# Altium PCB PCB.PcbDoc
Units mil, origin at the board's own origin, x right, y up, seen from the top; angles counter-clockwise.
Board outline 1930 x 2000 mil, 2 copper layers (Top Layer, Bottom Layer); 59 components, 49 nets, 237 pads, 14 vias.
Unrouted connection lines stored in the file: 1.
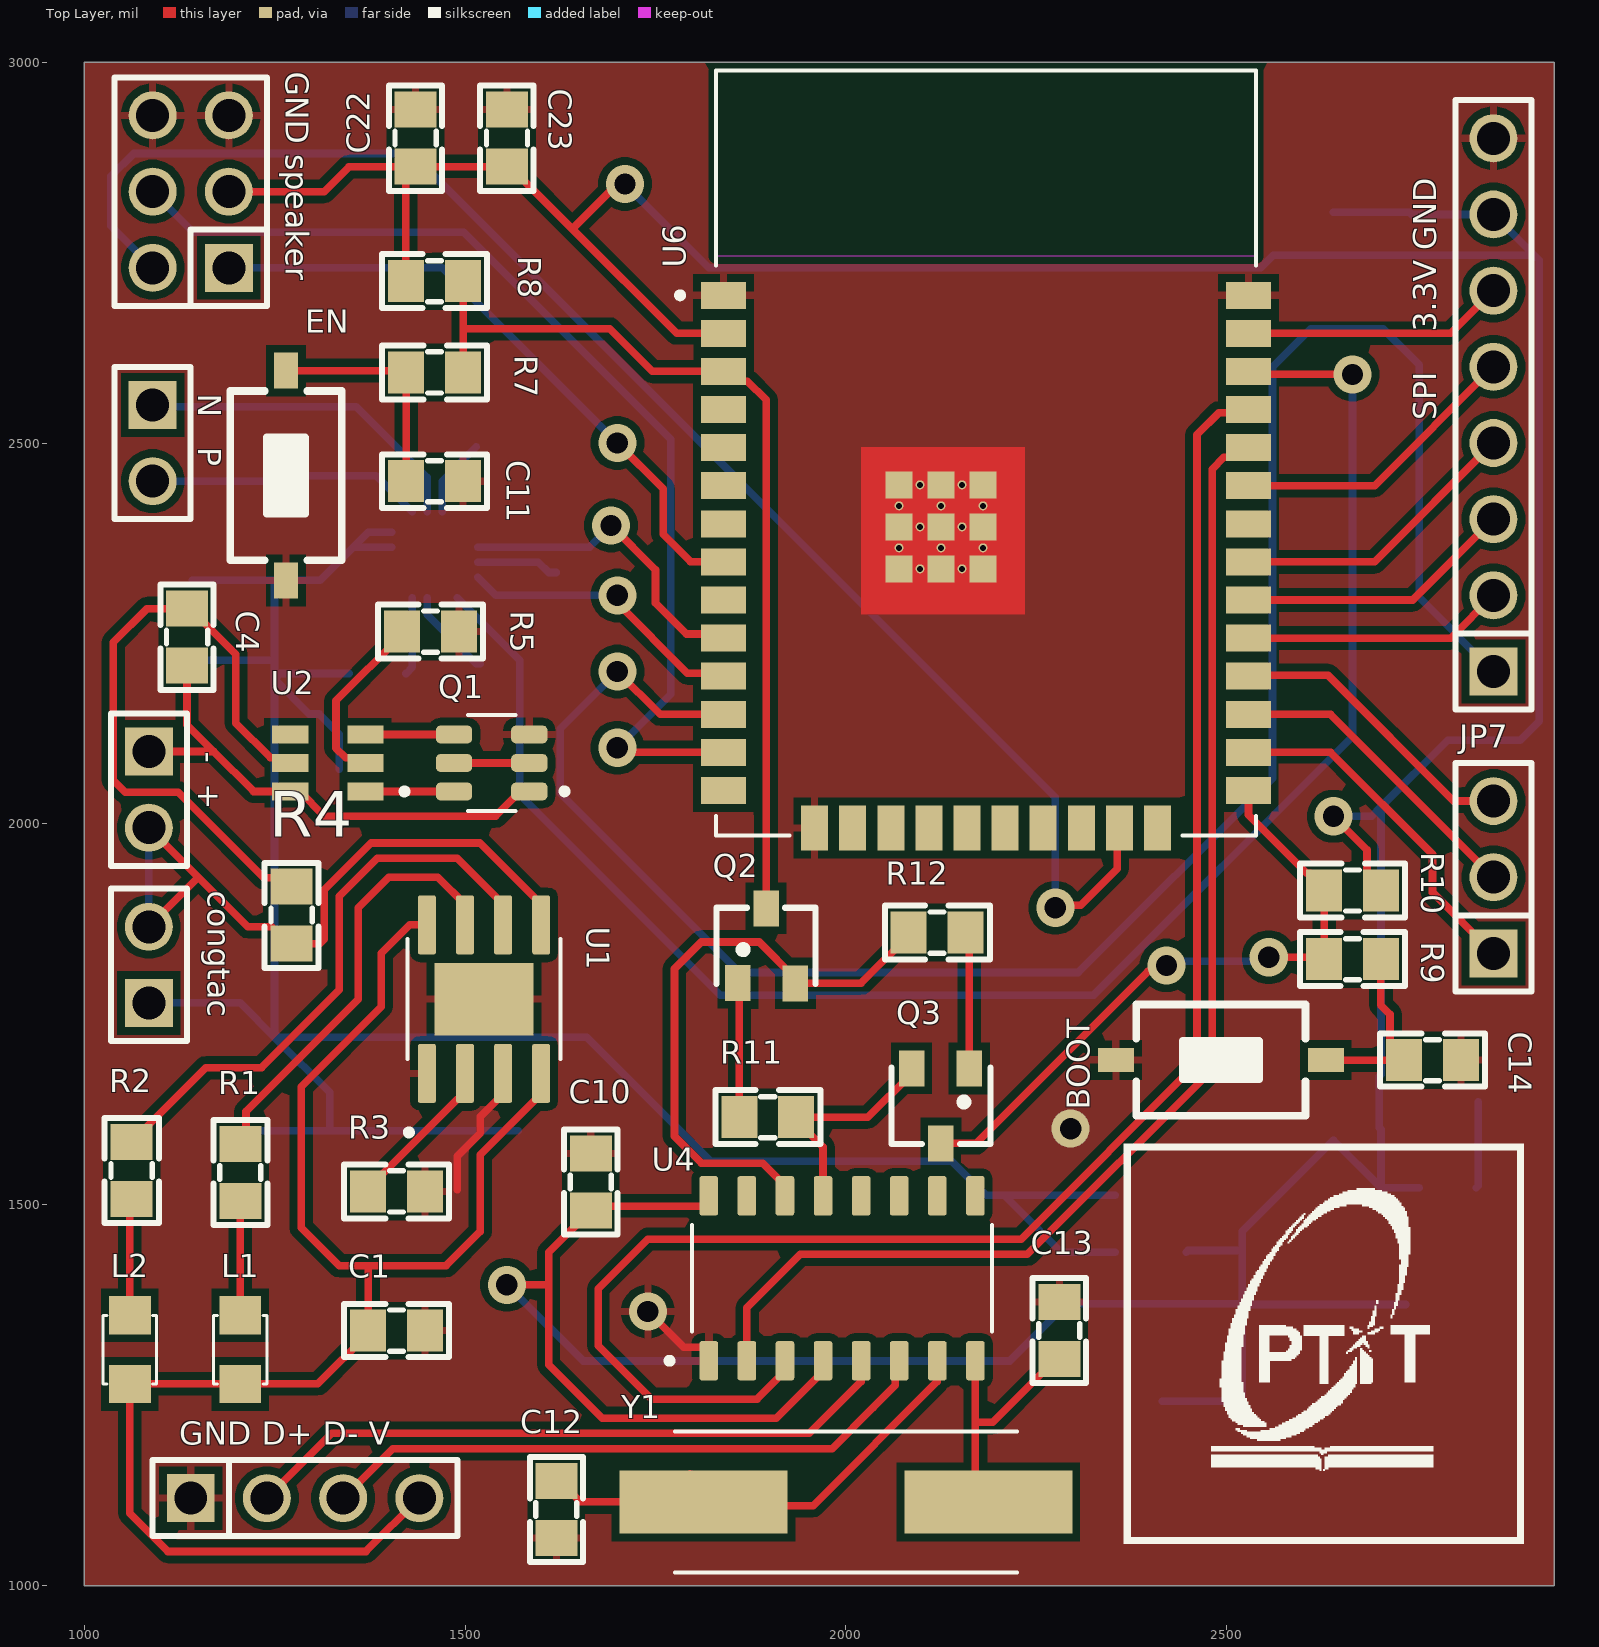
[diagram p0: Top Layer view]
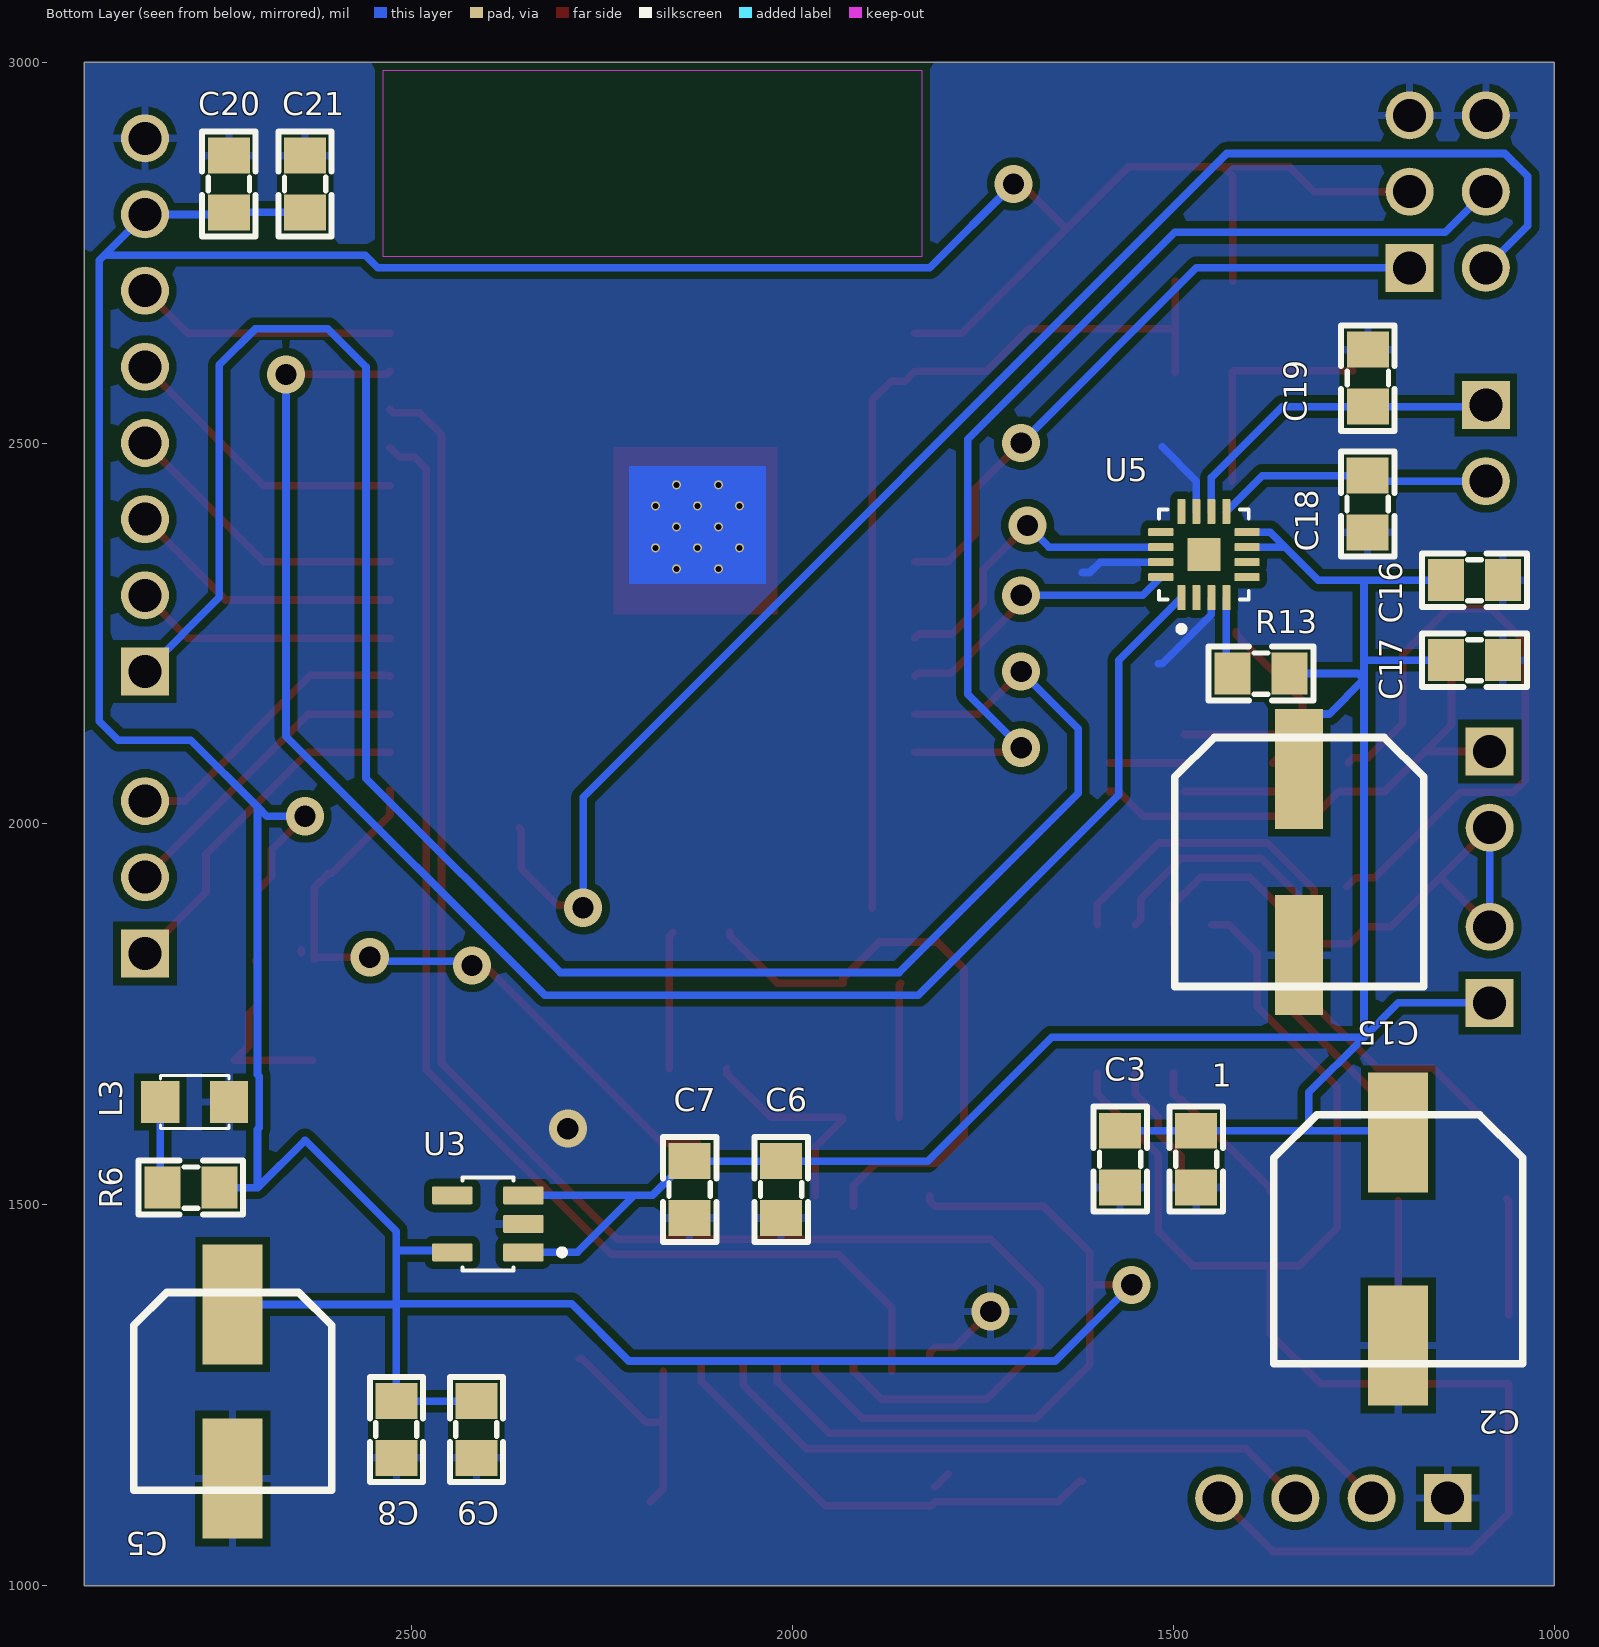
[diagram p1: Bottom Layer view, seen from below]
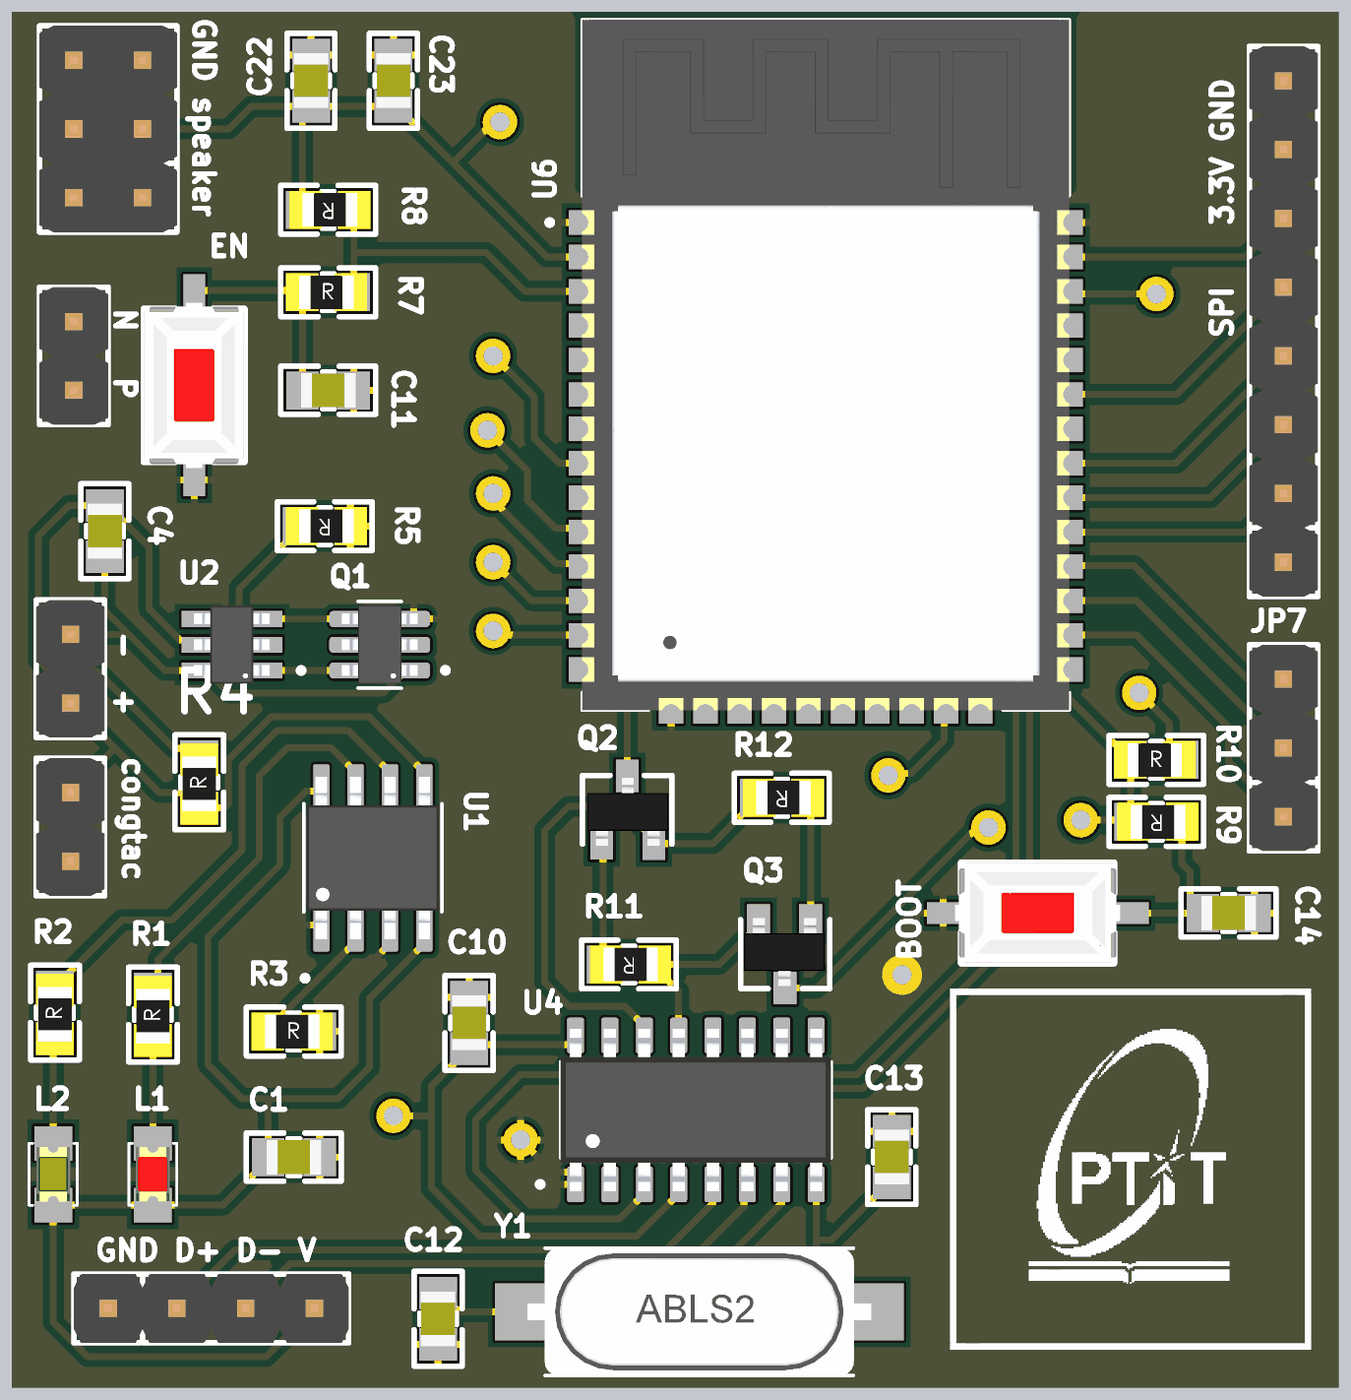
[diagram p2: 3D render of the assembled board from above, using the file's embedded part models]
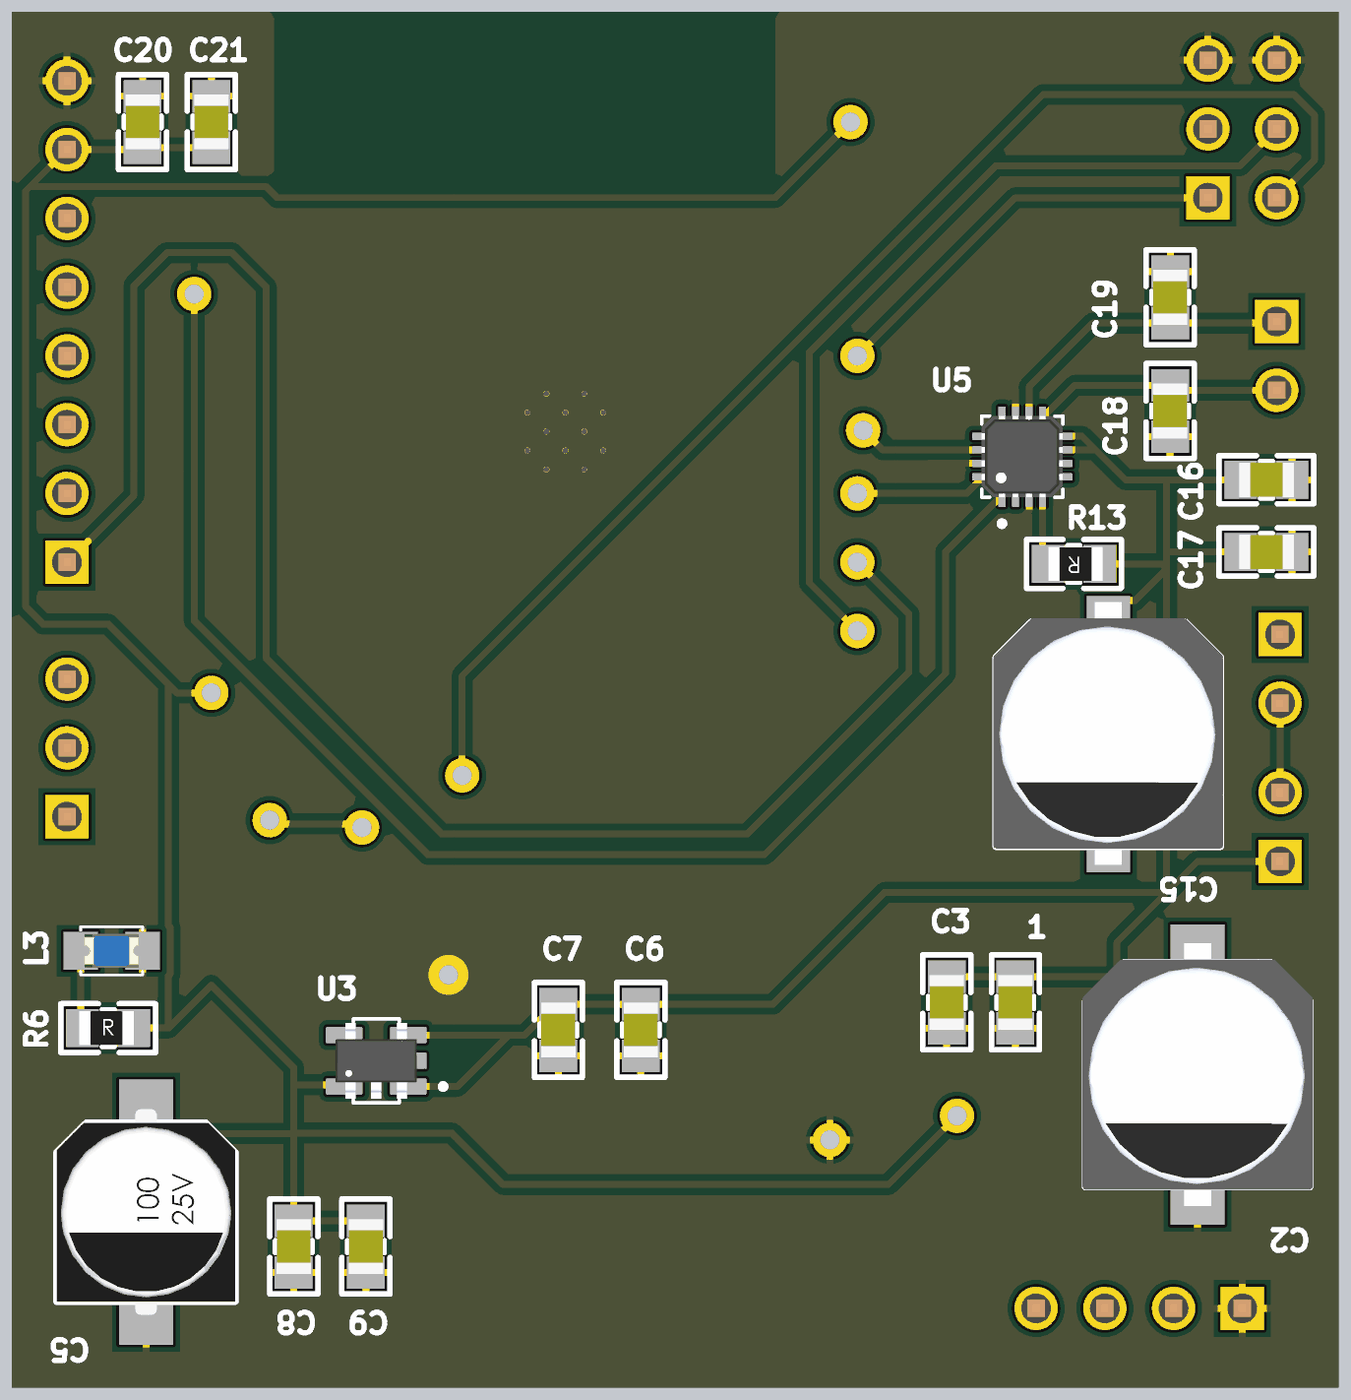
[diagram p3: 3D render of the assembled board from below, using the file's embedded part models]

## Layer stack, top to bottom
Top Solder: solder mask 0.4, Solder Resist, Dk 3.5
Top Layer: signal copper 1.4
Dielectric 1: dielectric 12.6, FR-4, Dk 4.8
Bottom Layer: signal copper 1.4
Bottom Solder: solder mask 0.4, Solder Resist, Dk 3.5

## Board outline
1000,1000 2930,1000 2930,3000 1000,3000

## Design rules (kind name [scope] priority, off if disabled: settings)
Clearance [All] p1: gap=10 ignorepadtopadclearanceinfootprint=FALSE
PolygonConnect [All] p1: connectstyle=Relief reliefconductorwidth=10 reliefentries=4 polygonreliefangle="90 Angle" airgapwidth=10
RoutingVias [All] p1: holewidth=28 width=50 viastyle="Through Hole" minholewidth=28 minwidth=50 maxholewidth=28 maxwidth=50
SolderMaskExpansion [All] p1: expansion=4 istentingtop=FALSE
SupplyNets "Schematic Supply Nets_2" [InNet('3.3V')] p1: voltage=0.000
SupplyNets "Schematic Supply Nets_1" [InNet('3.7-4.2 V')] p2: voltage=0.000
SupplyNets "Schematic Supply Nets" [InNet('GND')] p3: voltage=0.000
Width [All] p1: maxlimit=10 minlimit=10 preferedwidth=10
30 further rules are at their usual default settings.

## Classes and differential pairs
component class Source: C5 C6 C7 C8 C9 L3 R6 U3
component class Media: C15 C16 C17 C18 C19 C20 C21 "GND speaker" JP7 "N   P" R13 "SPI    3.3V GND" U5
component class Esp32: C22 C23 U6
component class Downloader: BOOT C10 C11 C12 C13 C14 EN Q2 Q3 R7 R8 R9 R10 R11 R12 U4 Y1
component class Battery: 1 "-  +" C1 C2 C3 C4 congtac "GND D+ D- V" L1 L2 Q1 R1 R2 R3 R4 R5 U1 U2

## Components (designator, comment, footprint, x,y, rotation, side; value= is the part's Value field where it differs from the comment)
1 "106" "tu 0805" 1470,1560 r270 bottom
"-  +" "PIN" "JP 1x2 DT" 1085,2095 r270 top (schematic designator JP3)
BOOT "Nut Nhan 2 Chan SMD 3x6x2.5" "Nut Nhan 2 Chan SMD 3x6x2.5" 2492.2,1690 r0 top (schematic designator BOOT1)
C1 "104" "tu 0805" 1410,1335 r0 top
C2 "470uF" "tu nhom 8 (f)" 1205,1455 r270 bottom
C3 "104" "tu 0805" 1570,1560 r270 bottom
C4 "104" "tu 0805" 1135,2245 r90 top
C5 "100uF" "tu nhom 6.3 (d)" 2735,1255 r270 bottom
C6 "106" "tu 0805" 2015,1520 r270 bottom
C7 "104" "tu 0805" 2135,1520 r270 bottom
C8 "106" "tu 0805" 2520,1205 r270 bottom
C9 "104" "tu 0805" 2415,1205 r270 bottom
C10 "104" "tu 0805" 1665,1530 r90 top
C11 "102" "tu 0805" 1460,2450 r0 top
C12 "22pF" "tu 0805" 1620,1100 r270 top
C13 "22pF" "tu 0805" 2280,1335 r90 top
C14 "102" "tu 0805" 2770,1690 r0 top
C15 "220uF" "tu nhom 8 (e)" 1335,1950 r270 bottom
C16 "106" "tu 0805" 1105,2320 r180 bottom
C17 "104" "tu 0805" 1105,2215 r180 bottom
C18 "221" "tu 0805" 1245,2420 r270 bottom
C19 "221" "tu 0805" 1245,2585 r90 bottom
C20 "106" "tu 0805" 2740,2840 r90 bottom
C21 "104" "tu 0805" 2640,2840 r90 bottom
C22 "106" "tu 0805" 1435,2900 r90 top
C23 "104" "tu 0805" 1555,2900 r90 top
congtac "JP 1x2 2.54" "JP 1x2 DT" 1085,1765 r90 top (schematic designator JP2)
EN "Nut Nhan 2 Chan SMD 3x6x2.5" "Nut Nhan 2 Chan SMD 3x6x2.5" 1265,2457.2 r90 top (schematic designator EN1)
"GND D+ D- V" "JP 1x4 2.54" "JP 1x4 DT" 1140,1115 r0 top (schematic designator JP1)
"GND speaker" "INMP441" "JP 2x3 DT" 1140,2830 r90 top (schematic designator JP4)
JP7 "JP 1x3 2.54" "JP 1x3 DT" 2850,1830 r90 top
L1 "LED 0805" LED-0805-Red 1205,1265 r90 top
L2 "LED 0805" LED-0805-Green 1060,1265 r90 top
L3 "LED 0805" LED-0805-Blue 2830,1635 r180 bottom
"N   P" "Speaker" "JP 1x2 DT" 1090,2550 r270 top (schematic designator JP5)
Q1 "FS8205" SOT95P280X145-6N#1 1535,2080 r180 top
Q2 "HF" SOT-23 1895,1840 r0 top value=C9014
Q3 "HF" SOT-23 2125,1630 r180 top value=C9014
R1 "1k" "tro smd 0805" 1202.61,1542.23 r90 top
R2 "1k" "tro smd 0805" 1060,1545 r90 top
R3 "1.2k" "tro smd 0805" 1410,1520 r0 top
R4 "100R" "tro smd 0805" 1270,1880 r90 top
R5 "1k" "tro smd 0805" 1455,2250 r180 top
R6 "1k" "tro smd 0805" 2790,1525 r180 bottom
R7 "470R" "Tro SMD 0805" 1460,2595 r0 top
R8 "10k" "tro smd 0805" 1460,2710 r180 top
R9 "470R" "Tro SMD 0805" 2665,1820 r180 top
R10 "10k" "tro smd 0805" 2665,1915 r0 top
R11 "10k" "tro smd 0805" 1897.57,1612.61 r180 top
R12 "10k" "tro smd 0805" 2120,1855 r180 top
R13 "1M" "tro smd 0805" 1385,2195 r0 bottom
"SPI    3.3V GND" "SPI" "JP 1x8 DT" 2850,2200 r90 top (schematic designator JP6)
U1 "TP4056" SOP127P600X175-9N 1525,1770 r90 top
U2 "DW01A" SOT95P280X145-6N#2 1320,2080 r180 top
U3 "AP2112K-3.3TRG1" SOT95P285X140-5N 2400,1475 r0 bottom
U4 "CH340G" SOIC127P600X180-16N 1995,1403.58 r90 top
U5 "MAX98357AETE+T" QFN50P300X300X80-17N 1460.16,2353.5 r90 bottom
U6 "ESP32-WROOM-32E_(16MB)" XCVR_ESP32-WROOM-32E_(16MB) 2183.94,2486.85 r0 top
Y1 "ABLS2-12.000MHZ-D4Y-T" XTAL_ABLS2-12.000MHZ-D4Y-T 2000,1110 r0 top

## Footprints (in the part's own frame and the unit in brackets; to place one, negate y for a bottom-side part, rotate by r counter-clockwise, add the part's x,y. Pads: shape width x height; smd on the part's side, far side on the other; paste and mask are expansions set on the pad)
"JP 1x2 DT" [mm] "2 pins, 1 row, straight, gold plating"
  rect 1.6x1.6 hole 1.1: 1(0,0)
  round 1.6 hole 1.1: 2(2.54,0)
  silkscreen extent -1.27,-1.27 3.81,1.27, body extent -1.27,-1.27 3.81,1.27, height 8.54
"JP 1x3 DT" [mm]
  rect 1.6x1.6 hole 1.1: 1(0,0)
  round 1.6 hole 1.1: 2(2.54,0) 3(5.08,0)
  silkscreen extent -1.27,-1.27 6.35,1.27, body extent -1.27,-1.27 6.35,1.27, height 8.54
"JP 1x4 DT" [mm] "4 pins, 1 row, straight, gold plating"
  rect 1.6x1.6 hole 1.1: 1(0,0)
  round 1.6 hole 1.1: 2(2.54,0) 3(5.08,0) 4(7.62,0)
  silkscreen extent -1.27,-1.27 8.89,1.27, body extent -1.27,-1.27 8.89,1.27, height 8.54
"JP 1x8 DT" [mm] "8 pins, 1 row, straight, gold plating"
  rect 1.6x1.6 hole 1.1: 1(0,0)
  round 1.6 hole 1.1: 2(2.54,0) 3(5.08,0) 4(7.62,0) 5(10.16,0) 6(12.7,0) 7(15.24,0) 8(17.78,0)
  silkscreen extent -1.27,-1.27 19.05,1.27, body extent -1.27,-1.27 19.05,1.27, height 8.54
"JP 2x3 DT" [mm]
  rect 1.6x1.6 hole 1.1: 1(-2.54,-1.27)
  round 1.6 hole 1.1: 2(0,-1.27) 3(2.54,-1.27) 4(2.54,1.27) 5(0,1.27) 6(-2.54,1.27)
  silkscreen extent -3.81,-2.54 3.81,2.54, body extent -3.81,-2.54 3.81,2.54, height 8.55
LED-0805-Blue [mil]
  rect 50x55 smd: 1(0,0) 2(90,0)
  silkscreen extent 0,-35 90,35, body extent 5,-25 85,25, height 43
LED-0805-Green [mil]
  rect 50x55 smd: 1(0,0) 2(90,0)
  silkscreen extent 0,-35 90,35, body extent 5,-25 85,25, height 43
LED-0805-Red [mil]
  rect 50x55 smd: 1(0,0) 2(90,0)
  silkscreen extent 0,-35 90,35, body extent 5,-25 85,25, height 43
"Nut Nhan 2 Chan SMD 3x6x2.5" [mm] "Switch SMD type"
  rect 1.2x0.8 smd: 1(-3.5,0) 2(3.5,0)
  silkscreen extent -2.82,-1.85 2.82,1.85, body extent -3.05,-1.85 3.05,1.85, height 2.5
QFN50P300X300X80-17N [mm]
  rrect25% 0.84x0.27 smd: 1(-1.435,0.75) 2(-1.435,0.25) 3(-1.435,-0.25) 4(-1.435,-0.75) 9(1.435,-0.75) 10(1.435,-0.25) 11(1.435,0.25) 12(1.435,0.75)
  rrect25% 0.27x0.84 smd: 5(-0.75,-1.435) 6(-0.25,-1.435) 7(0.25,-1.435) 8(0.75,-1.435) 13(0.75,1.435) 14(0.25,1.435) 15(-0.25,1.435) 16(-0.75,1.435)
  rect 1.1x1.1 smd paste-0.2: 17(0,0)
  silkscreen extent -2.57,-1.5 1.5,1.5, body extent -1.5,-1.5 1.5,1.5, height 0.9
SOIC127P600X180-16N [mm]
  rrect25% 1.31x0.62 smd: 1(-2.75,4.445) 2(-2.75,3.175) 3(-2.75,1.905) 4(-2.75,0.635) 5(-2.75,-0.635) 6(-2.75,-1.905) 7(-2.75,-3.175) 8(-2.75,-4.445) 9(2.75,-4.445) 10(2.75,-3.175) 11(2.75,-1.905) 12(2.75,-0.635) 13(2.75,0.635) 14(2.75,1.905) 15(2.75,3.175) 16(2.75,4.445)
  silkscreen extent -2.85,-5 1.78,5.85, body extent -3,-5 3,5, height 1.8
SOP127P600X175-9N [mm]
  rrect25% 1.97x0.6 smd: 1(-2.475,1.905) 2(-2.475,0.635) 3(-2.475,-0.635) 4(-2.475,-1.905) 5(2.475,-1.905) 6(2.475,-0.635) 7(2.475,0.635) 8(2.475,1.905)
  rect 2.413x3.302 smd paste-3: 9(0,0)
  silkscreen extent -4.54,-2.55 2,2.6, body extent -3,-2.45 3,2.45, height 1.75
SOT95P280X145-6N#1 [mm]
  rrect50% 1.21x0.59 smd: 1(-1.255,0.95) 2(-1.255,0) 3(-1.255,-0.95) 4(1.255,-0.95) 5(1.255,0) 6(1.255,0.95)
  silkscreen extent -2.53,-1.6 0.8,1.6, body extent -1.4,-1.45 1.4,1.45, height 1.45
SOT95P280X145-6N#2 [mm]
  rect 1.21x0.59 smd: 1(-1.255,0.95) 2(-1.255,0) 3(-1.255,-0.95) 4(1.255,-0.95) 5(1.255,0) 6(1.255,0.95)
  silkscreen extent -2.66,0.85 -2.46,1.05, body extent -1.4,-1.45 1.4,1.45, height 1.45
SOT95P285X140-5N [mm]
  rrect15% 1.35x0.6 smd: 1(-1.185,0.95) 2(-1.185,0) 3(-1.185,-0.95) 4(1.185,-0.95) 5(1.185,0.95)
  silkscreen extent -2.57,-1.55 0.85,1.55, body extent -1.5,-1.4 1.5,1.4, height 1.4
SOT-23 [mm] "SOT 23 _ 1-3-2"
  rect 0.85x1.2 smd: 1(-0.94,-1.245) 2(0.985,-1.25) 3(0.005,1.25)
  silkscreen extent -1.65,-1.27 1.65,1.27, body extent -1.47,-1.33 1.53,1.17, height 1.06
"tro smd 0805" [mm]
  rect 1.2x1.4 smd: 1(-0.946,-0.061) 2(0.954,-0.061)
  silkscreen extent -1.75,-0.97 1.75,0.84, body extent -1.56,-0.76 1.44,0.64, height 0.53
"Tro SMD 0805" [mm]
  rect 1.2x1.4 smd: 1(-0.946,-0.061) 2(0.954,-0.061)
  silkscreen extent -1.75,-0.97 1.75,0.84, body extent -1.56,-0.76 1.44,0.64, height 0.53
"tu 0805" [mm] "Compoment SMD 80x50mil"
  rect 1.2x1.4 smd: 1(-0.946,-0.003) 2(0.954,-0.003)
  silkscreen extent -1.75,-0.89 1.75,0.89, body extent -1.01,-0.64 1.01,0.63, height 0.61
"tu nhom 6.3 (d)" [mm]
  rect 4x2 smd: 1(-2.9,0) 2(2.9,0)
  silkscreen extent -3.3,-3.3 3.3,3.3, body extent -3.8,-3.3 3.8,3.3, height 8
"tu nhom 8 (e)" [mm]
  rect 4x1.6 smd: 1(-3.1,0) 2(3.1,0)
  silkscreen extent -4.15,-4.15 4.15,4.15, body extent -4.88,-4.25 4.82,4.25, height 10.5
"tu nhom 8 (f)" [mm]
  rect 4x2 smd: 1(-3.55,0) 2(3.55,0)
  silkscreen extent -4.15,-4.15 4.15,4.15, body extent -4.85,-4.25 4.85,4.25, height 10.5
XCVR_ESP32-WROOM-32E_(16MB) [mm]
  rect 1.5x0.9 smd: 1(-8.75,5.26) 2(-8.75,3.99) 3(-8.75,2.72) 4(-8.75,1.45) 5(-8.75,0.18) 6(-8.75,-1.09) 7(-8.75,-2.36) 8(-8.75,-3.63) 9(-8.75,-4.9) 10(-8.75,-6.17) 11(-8.75,-7.44) 12(-8.75,-8.71) 13(-8.75,-9.98) 14(-8.75,-11.25) 25(8.75,-11.25) 26(8.75,-9.98) 27(8.75,-8.71) 28(8.75,-7.44) 29(8.75,-6.17) 30(8.75,-4.9) 31(8.75,-3.63) 32(8.75,-2.36) 33(8.75,-1.09) 34(8.75,0.18) 35(8.75,1.45) 36(8.75,2.72) 37(8.75,3.99) 38(8.75,5.26)
  rect 0.9x1.5 smd: 15(-5.715,-12.5) 16(-4.445,-12.5) 17(-3.175,-12.5) 18(-1.905,-12.5) 19(-0.635,-12.5) 20(0.635,-12.5) 21(1.905,-12.5) 22(3.175,-12.5) 23(4.445,-12.5) 24(5.715,-12.5)
  rect 0.9x0.9 smd: 39_1(-2.9,-1.06) 39_2(-1.5,-1.06) 39_3(-0.1,-1.06) 39_4(-2.9,-2.46) 39_5(-1.5,-2.46) 39_6(-0.1,-2.46) 39_7(-2.9,-3.86) 39_8(-1.5,-3.86) 39_9(-0.1,-3.86)
  round 0.3 hole 0.2 mask+0: 39_10(-2.2,-1.06) 39_11(-0.8,-1.06) 39_12(-2.9,-1.76) 39_13(-1.5,-1.76) 39_14(-0.1,-1.76) 39_15(-2.2,-2.46) 39_16(-0.8,-2.46) 39_17(-2.9,-3.16) 39_18(-1.5,-3.16) 39_19(-0.1,-3.16) 39_20(-2.2,-3.86) 39_21(-0.8,-3.86)
  Keep-Out Layer region: 9,6.56 -9,6.56 -9,12.75 9,12.75
  silkscreen extent -10.3,-12.75 9,12.75, body extent -9,-12.75 9,12.75, height 3.25
XTAL_ABLS2-12.000MHZ-D4Y-T [mm]
  rect 5.6x2.1 smd: 1(-4.75,0) 2(4.75,0)
  silkscreen extent -5.7,-2.35 5.7,2.35, body extent -6.35,-2.35 6.35,2.35, height 3.16

## Part data
1 C6 C7 C8 C9 C16 C20 C21 C22 C23: library part "Tu 0805 106 16V 10%", "Dán", Chung_Loai=Dán, Don_Vi=Con, Ma_Hang=MH004553, So_Chan=2, Ten_Linh_Kien="Tụ 0805 106-10uF 10% 16V"
"-  +" congtac "N   P": library part "JP 1x2 2.54 Duc Thang", "Cắm", Chung_Loai=Cắm, Don_Vi=Con, Ma_Hang=MH000903, Ten_Linh_Kien="Jump Đơn Đực 2.54MM 1x40P Thẳng 11MM"
C1 C3 C4 C10 C17: library part "Tu 0805 104 50V 10%", "Dán", Chung_Loai=Dán, Don_Vi=Con, Ma_Hang=MH004551, So_Chan=2, Ten_Linh_Kien="Tụ 0805 104-100nF 10% 50V"
C2: library part "Tu Nhom 470uF 16V", "Dán", Chung_Loai=Dán, Don_Vi=Con, Ma_Hang=MH001940, So_Chan=2, Ten_Linh_Kien="Tụ Nhôm 470uF 16V 8x10.4MM"
C5: library part "Tu Nhom 100uF 16V", "Dán", Chung_Loai=Dán, Don_Vi=Con, Ma_Hang=MH002219, So_Chan=2, Ten_Linh_Kien="Tụ Nhôm 100uF 16V 6.3x5.4MM"
C11 C14: library part "Tu 0805 102 50V 10%", "Dán", Chung_Loai=Dán, Don_Vi=Con, Ma_Hang=MH004549, So_Chan=2, Ten_Linh_Kien="Tụ 0805 102-1nF 10% 50V"
C12 C13: library part "Tu 0805 22pF 50V 10%", "Dán", Chung_Loai=Dán, Don_Vi=Con, Ma_Hang=MH004560, So_Chan=2, Ten_Linh_Kien="Tụ 0805 22P 10% 50V"
C15: library part "Tu Nhom 220uF 10V", "Dán", Chung_Loai=Dán, Don_Vi=Con, Ma_Hang=MH004021, So_Chan=2, Ten_Linh_Kien="Tụ Nhôm 220uF 10V"
C18 C19: library part "Tu 0805 221 50V", "Dán", Chung_Loai=Dán, Don_Vi=Con, Ma_Hang=MH007365, So_Chan=2, Ten_Linh_Kien="Tụ 0805 221-220P 50V"
"GND D+ D- V": library part "JP 1x4 2.54 Duc Thang", "Cắm", Chung_Loai=Cắm, Don_Vi=Con, Ma_Hang=MH000903, Ten_Linh_Kien="Jump Đơn Đực 2.54MM 1x40P Thẳng 11MM"
"GND speaker": library part "JP 2x3 2.54 Duc Thang", "Cắm", Chung_Loai=Cắm, Don_Vi=Con, Ma_Hang=MH002686, Ten_Linh_Kien="Jump Đôi Đực 2.54MM 2x40P Thẳng 11MM"
JP7: library part "JP 1x3 2.54 Duc Thang", "Cắm", Chung_Loai=Cắm, Don_Vi=Con, Ma_Hang=MH000903, Ten_Linh_Kien="Jump Đơn Đực 2.54MM 1x40P Thẳng 11MM"
L1: library part "LED 0805 Do", "Dán", Chung_Loai=Dán, Don_Vi=Con, Ma_Hang=MH000897, Ten_Linh_Kien="LED 0805 Màu Đỏ (Red)"
L2: library part "LED 0805 Xanh La", "Dán", Chung_Loai=Dán, Don_Vi=Con, Ma_Hang=MH002326, Ten_Linh_Kien="LED 0805 Màu Xanh Lá (Green)"
L3: library part "LED 0805 Xanh Duong", "Dán", Chung_Loai=Dán, Don_Vi=Con, Ma_Hang=MH002327, Ten_Linh_Kien="LED 0805 Màu Xanh Dương (Blue)"
Q1: "ÐœÐžÐŸ-Ñ‚Ñ€Ð°Ð½Ð·Ð¸ÑÑ‚Ð¾Ñ€ Ñ Ð´Ð²Ð¾Ð¹Ð½Ñ‹Ð¼ N-ÐºÐ°Ð½Ð°Ð»ÑŒÐ½Ñ‹Ð¼ Ñ€ÐµÐ¶Ð¸Ð¼Ð¾Ð¼ ÑƒÑÐ¸Ð»ÐµÐ½Ð¸Ñ Ð¼Ð¾Ñ‰Ð½Ð¾ÑÑ‚Ð¸", Package=Package, Check_prices=https://www.snapeda.com/parts/FS8205/Fortune+Semiconductor/view-part/?ref=eda, MF="Fortune Semiconductor", MP=FS8205, SnapEDA_Link=https://www.snapeda.com/parts/FS8205/Fortune+Semiconductor/view-part/?ref=snap
Q2 Q3: library part "Trans C1815 HF SMD", "SOT-23"
R1 R2 R5 R6: library part "Tro 0805 5% 1k", "Dán", Chung_Loai=Dán, Don_Vi=Con, Ma_Hang=MH005234, So_Chan=2, Ten_Linh_Kien="Trở 0805 5% 1k"
R3: library part "Tro 0805 5% 1.2k", "Dán", Chung_Loai=Dán, Don_Vi=Con, Ma_Hang=MH005231, So_Chan=2, Ten_Linh_Kien="Trở 0805 5% 1.2k"
R4: library part "Tro 0805 5% 100R", "Dán", Chung_Loai=Dán, Don_Vi=Con, Ma_Hang=MH005251, So_Chan=2, Ten_Linh_Kien="Trở 0805 5% 100R"
R7 R9: library part "Tro 0805 5% 470R", "Dán", Chung_Loai=Dán, Don_Vi=Con, Ma_Hang=MH005341, So_Chan=2, Ten_Linh_Kien="Trở 0805 5% 470R"
R8 R10 R11 R12: library part "Tro 0805 5% 10k", "Dán", Chung_Loai=Dán, Don_Vi=Con, Ma_Hang=MH005239, So_Chan=2, Ten_Linh_Kien="Trở 0805 5% 10k"
R13: library part "Tro 0805 5% 1M", "Dán", Chung_Loai=Dán, Don_Vi=Con, Ma_Hang=MH005235, So_Chan=2, Ten_Linh_Kien="Trở 0805 5% 1M"
"SPI    3.3V GND": library part "JP 1x8 2.54 Duc Thang", "Cắm", Chung_Loai=Cắm, Don_Vi=Con, Ma_Hang=MH000903, Ten_Linh_Kien="Jump Đơn Đực 2.54MM 1x40P Thẳng 11MM"
U1: "Complete single cell Li-Ion battery with a constant current / constant voltage linear charger", Package=Package, Availability="Not in stock", Check_prices=https://www.snapeda.com/parts/TP4056/NanJing+Top+Power+ASIC+Corp./view-part/?ref=eda, MF="NanJing Top Power ASIC Corp.", MP=TP4056, Price=None, SnapEDA_Link=https://www.snapeda.com/parts/TP4056/NanJing+Top+Power+ASIC+Corp./view-part/?ref=snap
U2: "One Cell Lithium-ion/Polymer Battery Protection IC", Package="SOT-23-6 Fortune Semiconductor", Check_prices=https://www.snapeda.com/parts/DW01A/Fortune+Semiconductor/view-part/?ref=eda, MF="Fortune Semiconductor", MP=DW01A, SnapEDA_Link=https://www.snapeda.com/parts/DW01A/Fortune+Semiconductor/view-part/?ref=snap
U3: "Linear Voltage Regulator IC Positive Fixed 1 Output 600mA SOT-25", Package="SOT-753 Diodes Inc.", Availability="In Stock", Check_prices=https://www.snapeda.com/parts/AP2112K-3.3TRG1/Diodes+Inc./view-part/?ref=eda, MF="Diodes Inc.", MP=AP2112K-3.3TRG1, Price=None, Purchase-URL=https://pricing.snapeda.com/search/part/AP2112K-3.3TRG1/?ref=eda, SnapEDA_Link=https://www.snapeda.com/parts/AP2112K-3.3TRG1/Diodes+Inc./view-part/?ref=snap
U4: "USB Interface Integrated Circuit", Package=None, Availability="Not in stock", Check_prices=https://www.snapeda.com/parts/Ch340G/WCH/view-part/?ref=eda, MF=WCH, MP=Ch340G, Price=None, SnapEDA_Link=https://www.snapeda.com/parts/Ch340G/WCH/view-part/?ref=snap
U5: "Tiny, Low-Cost, PCM Class D Amplifier with Class AB Performance", Package="TQFN-16 Maxim", Check_prices=https://www.snapeda.com/parts/MAX98357AETE+T/Analog+Devices/view-part/?ref=eda, MF="Analog Devices", MP=MAX98357AETE+T, SnapEDA_Link=https://www.snapeda.com/parts/MAX98357AETE+T/Analog+Devices/view-part/?ref=snap
U6: "Bluetooth, WiFi 802.11b/g/n, Bluetooth v4.2 +EDR, Class 1, 2 and 3 Transceiver Module 2.4GHz ~ 2.5GHz Integrated, Trace Surface Mount", Package=None, Availability="Not in stock", Check_prices=https://www.snapeda.com/parts/ESP32-WROOM-32E%20(16MB)/Espressif+Systems/view-part/?ref=eda, MF="Espressif Systems", MP="ESP32-WROOM-32E (16MB)", Price=None, SnapEDA_Link=https://www.snapeda.com/parts/ESP32-WROOM-32E%20(16MB)/Espressif+Systems/view-part/?ref=snap
Y1: "HC/49US (AT49) LOW PROFILE SURFACE MOUNT MICROPROCESSOR CRYSTAL", Package="HC49/US Abracon", Availability="In Stock", Check_prices=https://www.snapeda.com/parts/ABLS2-12.000MHZ-D4Y-T/Abracon+LLC/view-part/?ref=eda, MF=Abracon, MP=ABLS2-12.000MHZ-D4Y-T, Price=None, Purchase-URL=https://pricing.snapeda.com/search/part/ABLS2-12.000MHZ-D4Y-T/?ref=eda, SnapEDA_Link=https://www.snapeda.com/parts/ABLS2-12.000MHZ-D4Y-T/Abracon+LLC/view-part/?ref=snap
BOOT EN: Ma_Hang=MH001036, Ten="Nút Nhấn 2 Chân 3x6x2.5MM SMD"

## Via types
v1: diameter 50, hole 28, Top Layer to Bottom Layer, 14 vias

## Nets (pads, with @x,y where several pads share a name; then routed paths per layer and width w, separated by ;. In a path a pad name is that pad's centre, name@x,y a point inside that pad or via, vN(x,y) a via of type N, cw(c..) or ccw(c..) an arc to the next point about the centre after c; other vN are vias at no path point)
3.3V: "GND speaker.2" "SPI    3.3V GND.7" C5.1 C8.1 C9.1 C10.1 C20.1 C21.1 C22.1 C23.1 R6.2 R8.2 R10.2 U3.5 U4.4 U4.16 U6.2 | length 6929.8
  Top Layer w10: 1190,2830 1315,2830 1347.77,2862.77 C22.1 ; R8.2 1422.43,2850.06 C22.1 ; v1(1555,1395) 1610,1395 ; v1(1710,2840) 1700,2840 1640.92,2780.92 ; U4.16 1820,1505.47 1812.8,1498.27 1670.63,1498.27 1610,1437.64 1610,1395 ; U6.2 1777.91,2643.94 1640.92,2780.92 ; U4.4 1970,1281.73 1908.27,1220 1680,1220 1610,1290 1610,1395 ; v1(2640,2010) 2683.95,1966.05 2683.95,1931.23 R10.2 ; C22.1 C23.1 1559.07,2862.77 1640.92,2780.92
  Bottom Layer w10: v1(1555,1395) 1655,1295 2215,1295 2290,1370 2520.13,1370 ; v1(1710,2840) 1819.88,2730.12 2544.48,2730.12 2560.86,2746.5 2903.5,2746.5 ; C9.1 C8.1 2520.13,1370 ; U3.5 2449.06,1440 2515,1440 ; C21.1 C20.1 2742.64,2800 2850,2800 2903.5,2746.5 ; v1(2640,2010) 2690,2010 2702.39,2022.39 ; C5.1 2520.96,1369.17 2520.13,1370 ; R6.2 2702.39,1522.61 ; 2520.13,1370 2520.13,1465.13 2640,1585 2702.39,1522.61 ; 2702.39,1522.61 2702.39,1598.89 2700,1601.29 2700,1668.71 2702.39,1671.11 2702.39,2022.39 ; 2702.39,2022.39 2790,2110 2885,2110 2910,2135 2910,2740 2903.5,2746.5
"3.7-4.2 V": 1.1 C2.1 C3.1 C6.1 C7.1 C15.1 C16.1 C17.1 congtac.1 R13.1 U3.1 U3.3 U5.7 U5.8 | length 3376.2
  Bottom Layer w10: congtac.1 1205,1765 1252.5,1717.5 ; C17.1 1250,2214.87 ; C16.1 1250,2319.87 ; C2.1 1207.46,1597.23 1322.23,1597.23 ; C15.1 1335,2117.75 1308.5,2144.25 1295.75,2144.25 1250,2190 ; R13.1 1257.39,2197.39 1250,2190 ; U5.7 1353.35,2363.35 ; U5.8 1373.03,2383.03 1353.35,2363.35 ; C3.1 1.1 1322.23,1597.23 ; U3.1 2282.4,1437.6 2207.6,1512.4 ; U3.3 2207.6,1512.4 ; 1250,2190 1250,2214.87 ; 1250,2190 1250,1725 1255,1720 ; 1250,2214.87 1250,2319.87 ; 1250,2319.87 1309.87,2319.87 1353.35,2363.35 ; 1252.5,1717.5 1322.23,1647.77 1322.23,1597.23 ; 1252.5,1717.5 1255,1720 ; 1255,1720 1660,1720 1822.77,1557.23 C6.1 C7.1 2139.07,1557.23 2183.9,1512.4 2207.6,1512.4
B+: "-  +.2" congtac.2 R4.1 U1.5 | length 953
  Top Layer w10: congtac.2 1150,1930 ; 1085,1995 1150,1930 ; U1.5 1600,1894.41 1519.41,1975 1376.72,1975 1315,1913.28 1315,1848.63 1309.14,1842.77 R4.1 1268.46,1842.77 1246.23,1865 1215,1865 1150,1930
  Bottom Layer w10: congtac.2 1085,1995
B-: "-  +.1" C4.1 Q1.1 U2.6 | length 710.8
  Top Layer w10: 1110,2120 1085,2095 1170,2095 ; C4.1 1135.13,2130.13 1135,2130 1170,2095 ; Q1.1 1572.6,2042.6 1540,2010 1315.39,2010 1282.8,2042.6 U2.6 1222.4,2042.6 1170,2095
GND: 1.2 "GND D+ D- V.1" "GND speaker.3" "GND speaker.4" "SPI    3.3V GND.8" BOOT.1 C1.2 C2.2 C3.2 C5.2 C6.2 C7.2 C8.2 C9.2 C10.2 C11.2 C12.2 C13.2 C14.2 C15.2 C16.2 C17.2 C18.2 C19.2 C20.2 C21.2 C22.2 C23.2 EN.1 L3.2 Q1.3 R3.2 R5.1 U1.1 U1.3 U1.9 U3.2 U4.1 U5.3 U5.11 U5.15 U6.1 U6.15 U6.38 U6.39_1 U6.39_2 U6.39_3 U6.39_4 U6.39_5 U6.39_6 U6.39_7 U6.39_8 U6.39_9 | length 621.8
  Top Layer w10: 1490,1520 1490,1563.87 1520,1593.87 1520,1615.59 1550,1645.59 U1.3 ; v1(1740,1360) 1786.95,1313.05 1812.8,1313.05 1820,1305.85 U4.1
  Bottom Layer w10: U5.3 1450.32,2274.68 1515,2210 1520,2210 ; U5.11 1470,2450 1515,2495 ; U5.15 1596.34,2343.66 1610,2330 1620,2330
  other v1: 2295,1600
NetBOOT1_2: BOOT.2 C14.1 R9.1 | length 251.2
  Top Layer w10: BOOT.2 C14.1@2732.64,1690 ; R9.1@2704.62,1820 R9.1 2702.23,1762.09 2714.15,1750.17 2714.15,1708.49 C14.1@2732.64,1690 ; C14.1 C14.1@2732.64,1690
NetC1_1: "GND D+ D- V.4" C1.1 L1.1 L2.1 U1.4 U1.8 | length 2023.8
  Top Layer w10: 1440,1115 1370,1045 1110,1045 1060,1095 L2.1 L1.1 1306.84,1265 1372.77,1330.93 C1.1 1372.77,1417.77 1375,1420 ; U1.8 1427.44,1867.44 1390,1830 1390,1760 1285,1655 1285,1470 1335,1420 1375,1420 ; U1.4 1600,1645.59 1520,1565.59 1520,1465 1475,1420 1375,1420
NetC4_2: C4.2 R4.2 U2.5 | length 860.1
  Top Layer w10: U2.5 1263.98,2086.61 1244.73,2086.61 1199.13,2132.22 1199.13,2222.52 1139.07,2282.57 C4.2 1082.57,2282.57 1038.5,2238.5 1038.5,2057.29 1054.3,2041.5 1123.5,2041.5 1235.69,1929.31 1260.66,1929.31 R4.2
NetC11_1: C11.1 EN.2 R7.1 | length 301.5
  Top Layer w10: EN.2 1420.38,2595 R7.1 C11.1
NetC12_1: C12.1 U4.7 Y1.1 | length 632.6
  Top Layer w10: C12.1 1623.8,1137.23 1651.03,1110 Y1.1 1817.99,1105 1956.85,1105 2120,1268.15 U4.7 ; Y1.1@1795.76,1147.23 Y1.1@1812.99,1130
NetC13_1: C13.1 U4.8 Y1.2 | length 323.5
  Top Layer w10: U4.8@2170,1281.73 2170,1214.37 ; Y1.2 2170,1127.01 2170,1214.37 ; C13.1 2276.2,1297.77 2192.8,1214.37 2170,1214.37
NetC18_1: "N   P.2" C18.1 U5.9 | length 363.2
  Bottom Layer w10: 1090,2450 1237.91,2450 C18.1 1249.07,2457.23 1383.4,2457.23 U5.9
NetC19_1: "N   P.1" C19.1 U5.10 | length 444.5
  Bottom Layer w10: 1090,2550 1092.23,2547.77 C19.1 1357.23,2547.77 1450.32,2454.68 U5.10
NetJP1_2: "GND D+ D- V.2" U4.5 | length 870.6
  Top Layer w10: 1240,1115 1325,1200 1951.85,1200 2020,1268.15 U4.5
NetJP1_3: "GND D+ D- V.3" U4.6 | length 820.6
  Top Layer w10: 1340,1115 1405,1180 1981.85,1180 2035.49,1233.64 2064.87,1263.02 2064.87,1290.19 U4.6
NetJP4_1: "GND speaker.1" U6.8 | length 844.5
  Top Layer w10: v1(1700,2500) 1760,2440 1760,2380 1796.06,2343.94 U6.8
  Bottom Layer w10: 1190,2730 1470,2730 v1(1700,2500)
NetJP4_5: "GND speaker.5" U6.13 | length 1390.6
  Top Layer w10: v1(1700,2100) 1706.06,2093.94 U6.13
  Bottom Layer w10: 1090,2830 1143.5,2776.5 1498.5,2776.5 1770,2505 1770,2170 v1(1700,2100)
NetJP4_6: "GND speaker.6" U6.23 | length 2047.3
  Top Layer w10: v1(2275,1890) 2278.28,1893.28 2308.28,1893.28 2356.05,1941.05 2356.05,1991.84 U6.23
  Bottom Layer w10: 1090,2730 1035,2785 1035,2850 1065,2880 1430,2880 2275,2035 v1(2275,1890)
NetJP6_1: "SPI    3.3V GND.1" U6.12 | length 2707.5
  Top Layer w10: v1(1700,2200) 1756.06,2143.94 U6.12
  Bottom Layer w10: v1(1700,2200) 1625,2125 1625,2040 1860,1805 2305,1805 2560,2060 2560,2600 2610,2650 2705,2650 2752.54,2602.46 2752.54,2297.46 2850,2200
NetJP6_2: "SPI    3.3V GND.2" U6.29 | length 344.8
  Top Layer w10: U6.29 2793.94,2243.94 2850,2300
NetJP6_3: "SPI    3.3V GND.3" U6.30 | length 365.5
  Top Layer w10: U6.30 2743.94,2293.94 2850,2400
NetJP6_4: "SPI    3.3V GND.4" U6.31 | length 386.2
  Top Layer w10: U6.31 2693.94,2343.94 2850,2500
NetJP6_5: "SPI    3.3V GND.5" U6.33 | length 386.2
  Top Layer w10: U6.33 2693.94,2443.94 2850,2600
NetJP6_6: "SPI    3.3V GND.6" U6.37 | length 344.8
  Top Layer w10: U6.37 2793.94,2643.94 2850,2700
NetJP7_1: JP7.1 U6.26 | length 460.2
  Top Layer w10: U6.26 2636.06,2093.94 2770,1960 2770,1910 JP7.1
NetJP7_2: JP7.2 U6.27 | length 410.2
  Top Layer w10: U6.27 2636.06,2143.94 JP7.2
NetJP7_3: JP7.3 U6.28 | length 390.4
  Top Layer w10: U6.28 2529.49,2195 2632.83,2195 2797.83,2030 JP7.3
NetL1_2: L1.2 R1.1 | length 150
  Top Layer w10: L1.2 R1.1
NetL2_2: L2.2 R2.1 | length 153.8
  Top Layer w10: L2.2 1060,1505.38 R2.1
NetL3_1: L3.1 R6.1 | length 113.5
  Bottom Layer w10: R6.1 2830,1525.38 L3.1
NetQ1_2: Q1.2 Q1.5 | length 98.8
  Top Layer w10: Q1.5 Q1.2
NetQ1_4: Q1.4 U2.3 | length 116.2
  Top Layer w10: U2.3 Q1.4
NetQ1_6: Q1.6 U2.1 | length 116.2
  Top Layer w10: U2.1 Q1.6
NetQ2_1: Q2.1 R11.2 | length 176.8
  Top Layer w10: Q2.1 1860,1789 R11.2
NetQ2_2: Q2.2 R12.2 U4.14 | length 797.2
  Top Layer w10: U4.14@1920,1498.27 U4.14 1920,1525.43 1890.91,1554.53 1810.47,1554.53 1775,1590 1775,1810 1810,1845 1886.48,1845 1933.8,1797.68 Q2.2 2019.76,1790.79 2082.43,1853.46 R12.2
NetQ2_3: Q2.3 R7.2 R8.1 U6.3 | length 1224.6
  Top Layer w10: R8.1 1497.57,2712.05 1497.57,2652.33 ; R7.2 1497.57,2652.33 ; Q2.3 1895.2,2556.64 1870.62,2581.22 1852.17,2581.22 U6.3 1746.06,2593.94 1690,2650 1499.9,2650 1497.57,2652.33
NetQ3_1: Q3.1 R12.1 | length 180.4
  Top Layer w10: R12.1 2162,1852.62 Q3.1
NetQ3_2: Q3.2 R11.1 U4.13 | length 299.8
  Top Layer w10: U4.13 1970,1575.87 1934.8,1611.06 R11.1 2028.88,1615 2086.2,1672.32 Q3.2
NetQ3_3: Q3.3 R9.2 R10.1 U6.25 | length 873.9
  Top Layer w10: Q3.3 2170.79,1580.79 2396.56,1806.56 2413.13,1806.56 v1(2420.78,1814.22) ; U6.25 2528.43,2011.95 2605.21,1935.17 2609.15,1935.17 2627.77,1916.54 R10.1 2627.77,1822.74 R9.2 2624.82,1825 v1(2555,1825) ; R9.2@2645,1831.06 R9.2@2645,1835
  Bottom Layer w10: v1(2420.78,1814.22) 2426.18,1819.61 2549.61,1819.61 v1(2555,1825)
NetR1_2: R1.2 U1.7 | length 572.7
  Top Layer w10: R1.2 1212.57,1587.37 1212.57,1622.57 1360,1770 1360,1890 1400,1930 1464.41,1930 1500,1894.41 U1.7
NetR2_2: R2.2 U1.6 | length 766.2
  Top Layer w10: R2.2 1159.82,1680 1232.8,1680 1335,1782.2 1335,1905 1385,1955 1490,1955 1543.19,1901.81 1543.19,1874.25 U1.6
NetR3_1: R3.1 U1.2 | length 209.5
  Top Layer w10: R3.1 1372.77,1521.54 1490.01,1638.78 1493.19,1638.78 1500,1645.59 U1.2
NetR5_2: R5.2 U2.2 | length 235.7
  Top Layer w10: U2.2 1362.8,2086.61 1343.55,2086.61 1330.59,2099.57 1330.59,2161.62 1417.43,2248.46 R5.2
NetR13_2: R13.2 U5.4 | length 103
  Bottom Layer w10: R13.2 1430.63,2205.45 U5.4
NetU4_2: U4.2 U6.34 | length 1671.1
  Top Layer w10: U4.2@1870,1281.73 1870,1365 1940,1435 2178.85,1435 2238.28,1435 2480.78,1677.5 2480.78,2465.78 2496.22,2481.22 2515.71,2481.22 U6.34
NetU4_3: U4.3 U6.35 | length 2192.5
  Top Layer w10: U4.3 1920,1281.73 1883.27,1245 1745,1245 1675,1315 1675,1390 1740,1455 2230,1455 2460.78,1685.78 2460.78,2510.78 2489.76,2539.76 2524.24,2539.76 U6.35
NetU5_1: U5.1 U6.36 | length 2249.1
  Top Layer w10: U6.36 2532.36,2590 v1(2665,2590)
  Bottom Layer w10: U5.1 1571.69,2215 1571.69,2038.31 1835,1775 2325,1775 2665,2115 v1(2665,2590)
NetU5_14: U5.14 U6.10 | length 421.2
  Top Layer w10: v1(1691.72,2391.72) 1750,2333.43 1750,2290 1790.78,2249.22 1834.16,2249.22 U6.10
  Bottom Layer w10: U5.14 1663.35,2363.35 v1(1691.72,2391.72)
NetU5_16: U5.16 U6.11 | length 382.5
  Top Layer w10: v1(1700,2300) 1700,2290 1792,2198 1835.39,2198 U6.11
  Bottom Layer w10: U5.16 1540.63,2300 v1(1700,2300)
pads on no net: U2.4 U3.4 U4.9 U4.10 U4.11 U4.12 U4.15 U5.2 U5.5 U5.6 U5.12 U5.13 U5.17 U6.4 U6.5 U6.6 U6.7 U6.9 U6.14 U6.16 U6.17 U6.18 U6.19 U6.20 U6.21 U6.22 U6.24 U6.32 U6.39_10 U6.39_11 U6.39_12 U6.39_13 U6.39_14 U6.39_15 U6.39_16 U6.39_17 U6.39_18 U6.39_19 U6.39_20 U6.39_21

## Polygon pours and split planes (outlines as drawn)
GND on Bottom Layer "NONET_L-01_P-001" (solid, pour order 2): 2930,3000 1000,3000 1000,1000 2930,1000
GND on Top Layer "NONET_L-01_P-001" (solid, pour order 3): 1000,3000 2930,3000 2930,1000 1000,1000

## Other copper
Top Layer:
  rectangle: 2020,2275 2235,2495
Bottom Layer:
  rectangle net GND: 2035,2315 2215,2470

## Silkscreen, mask and mechanical layers (free items; w line width, h text height)
Top Overlay:
  drawing of 23 lines, arcs and shapes, not listed
Mechanical 1:
  region: 2094.67,1431.67 2094.67,1434 2097,1434 2097,1431.67

## Text inside footprints (layer, text, board x,y; h text height)
U6: Mechanical 13 "ANTENNA" at 1947.72,2841.18 h70